# EAGLE board Irnardo_REVAbkp (EAGLE 6.5.0)
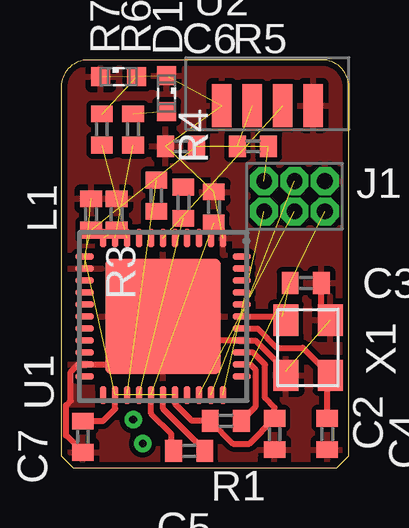
[diagram p0: board, top side]
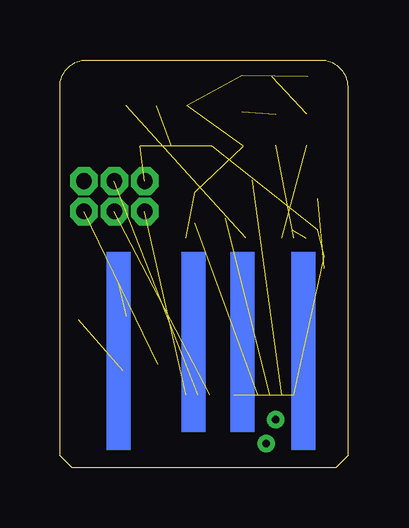
[diagram p1: board, bottom side, seen from below]

Size 12 x 17 mm. Coordinates in mm from the lower left corner, seen from the top.
Outline: 0.5,0 11.5,0 12,0.5 12,15.88 arc90 10.88,17 1.12,17 arc90 0,15.88 0,0.5 0.5,0
Copper layers (1*16): Top 0.035mm / dielectric 1.5mm / Bottom 0.035mm
Design rules "default *": minimum track width 10mil, minimum drill 24mil, track to track 8mil, track to pad 8mil, pad to pad 8mil, via to via 8mil, smd to smd 8mil, copper to edge 10mil, drill to drill 8mil, minimum pad ring 10mil, minimum via ring 8mil, stop-mask expansion 4mil, vias tented up to drill 0mil, thermal gap 10mil

## Footprints (pad centres in the part's own frame; a part is rotated, then mirrored left to right if it is on the bottom)
C0402 = smd 0.7 x 0.9: 1 -0.65,0; 2 0.65,0
SML0603 = smd 0.8 x 0.8: A 0.75,0; C -0.75,0
6X2005IN = drill 0.65 pad 0.813 octagon: 1 -1.27,0; 2 -1.27,1.27; 3 0,0; 4 0,1.27; 5 1.27,0; 6 1.27,1.27
0402 = smd 0.7 x 0.9: 1 -0.65,0; 2 0.65,0
R0402 = smd 0.7 x 0.9: 1 -0.65,0; 2 0.65,0
SMARTPRJ_QFN44ML7X7 = smd 0.75 x 0.275: 1 -3.275,2.5; 2 -3.275,2; 3 -3.275,1.5; 4 -3.275,1; 5 -3.275,0.5; 6 -3.275,0; 7 -3.275,-0.5; 8 -3.275,-1; 9 -3.275,-1.5; 10 -3.275,-2; 11 -3.275,-2.5; 23 3.275,-2.5; 24 3.275,-2; 25 3.275,-1.5; 26 3.275,-1; 27 3.275,-0.5; 28 3.275,0; 29 3.275,0.5; 30 3.275,1; 31 3.275,1.5; 32 3.275,2; 33 3.275,2.5 | smd 0.275 x 0.75: 12 -2.5,-3.275; 13 -2,-3.275; 14 -1.5,-3.275; 15 -1,-3.275; 16 -0.5,-3.275; 17 0,-3.275; 18 0.5,-3.275; 19 1,-3.275; 20 1.5,-3.275; 21 2,-3.275; 22 2.5,-3.275; 34 2.5,3.275; 35 2,3.275; 36 1.5,3.275; 37 1,3.275; 38 0.5,3.275; 39 0,3.275; 40 -0.5,3.275; 41 -1,3.275; 42 -1.5,3.275; 43 -2,3.275; 44 -2.5,3.275 | smd 4.826 x 4.826: EXP 0,0
TSOP755 = smd 0.8 x 1.8: 1 0,0; 2 1.27,0; 3 2.54,0; 4 3.81,0
SMARTPRJ_CRYSTAL-3.2-2.5 = smd 1.3 x 1.05: 1 -1.15,-0.925; 2 1.15,-0.925; 3 1.15,0.925; 4 -1.15,0.925

## Placement (x,y rotation side)
C1  100n  [C0402]  1.25,10.56 90 top
C2  100n  [C0402]  8.9,1.4 270 top
C3  22p  [C0402]  10.2,7.7 0 top
C4  22p  [C0402]  11.1,1.4 270 top
C5  1uF  [C0402]  5.34,0.7 180 top
C6  100n  [C0402]  5,13.4 180 top
C7  100n  [C0402]  0.9,1.29 270 top
D1  RED  [SML0603]  4.4,15.6 270 top
D2  950nm  [SML0603]  2.4,16.3 0 top
J1  ICSP  [6X2005IN]  9.73,10.68 0 top
L1  30Z  [0402]  6.37,10.85 90 top
R1  10K  [R0402]  6.87,1.95 0 top
R3  22R  [R0402]  3.97,11.34 90 top
R4  22R  [R0402]  5.1,11.05 270 top
R5  100R  [R0402]  8,13.4 180 top
R6  [R0402]  3,14.1 90 top
R7  [R0402]  1.7,14.1 90 top
R8  10K  [R0402]  2.31,10.56 90 top
U1  ATMEGA32U4-MU  [SMARTPRJ_QFN44ML7X7]  4.25,6.3 90 top
U2  TSOP755  [TSOP755]  6.7,15.1 0 top
X1  16MHz  [SMARTPRJ_CRYSTAL-3.2-2.5]  10.3,5 270 top

## Library data of the parts
C1-C7 R1 R3-R8 = resistor
D1 D2 = led
J1 = 6X2005IN
L1 = inductors
U1 X1 = Arduino_Leonardo-REV3b
U2 = TSOP755; U: TSOP755

## Nets
+5V: C1.1 C2.1 C6.1 C7.1 J1.2 R1.1 R5.1 U1.2 U1.7 U1.14 U1.34
AREF: U1.42
AVCC: U1.24
AVCC1: U1.44
D+: R4.1
D-: R3.1
GND: C1.2 C2.2 C3.2 C4.2 C6.2 C7.2 D1.C D2.C J1.6 L1.2 R8.2 U1.15 U1.23 U1.35 U1.43 U1.EXP U2.1 U2.4 X1.2 X1.4
IO5: R7.1 U1.31
IO8: U1.28 U2.3
IO13: R6.1 U1.32
MISO: J1.1 U1.11
MOSI: J1.4 U1.10
N$1: C3.1 U1.17 X1.1
N$2: C4.1 U1.16 X1.3
N$5: R5.2 U2.2
N$7: D2.A R7.2
N$8: D1.A R6.2
N$9: R8.1 U1.33
RD+: R4.2 U1.4
RD-: R3.2 U1.3
RESET: J1.5 R1.2 U1.13
SCK: J1.3 U1.9
UCAP: C5.1 U1.6
UGND: C5.2 L1.1 U1.5

## Tracks (layer width: path | path; a pad name or v marks a point on that pad's centre or on a via)
+5V  (6 unrouted)
  Top 0.254: U1.14 8,4.8 8.5,4.3 8.5,2.9 8.9,2.5 C2.1 7.85,1 7.17,1 R1.1 5.45,1.95 4.75,2.65 U1.7 | C7.1 1.74,1.94 2.25,2.45 U1.2
GND  (7 unrouted)
  Top 0.254: C7.2 0.2,1.34 0.2,2.6 0.4,2.8 0.4,4 0.7,4.3 U1.43 2.25,4.3 U1.EXP 5.25,5.3 U1.15 8.1,5.3 9.38,4.03 X1.2 | X1.4 10.85,6.53 C3.2
  pour Top: -0.5,17.5 -0.5,-0.5 12.5,-0.5 12.5,17.5
IO5  (1 unrouted)
IO8  (1 unrouted)
IO13  (1 unrouted)
MISO  (1 unrouted)
MOSI  (1 unrouted)
N$1  (1 unrouted)
  Top 0.254: U1.17 9.22,6.3 X1.1
N$2
  Top 0.254: U1.16 8.2,5.8 9,5 10.07,5 X1.3 11.1,3.73 C4.1
N$3  (via drill 0.32 pad 0.25)
  other vias: 3,2
N$4  (via drill 0.32 pad 0.25)
  other vias: 3.4,1
N$5  (1 unrouted)
N$7  (1 unrouted)
N$8  (1 unrouted)
N$9  (1 unrouted)
RD+  (1 unrouted)
RD-  (1 unrouted)
RESET  (1 unrouted)
  Top 0.254: U1.13 7.9,4.3 8.1,4.1 8.1,2.53 R1.2
SCK  (1 unrouted)
UCAP
  Top 0.254: C5.1 4.25,2.44 U1.6
UGND  (1 unrouted)
  Top 0.254: C5.2 4.6,0.79 4.6,1.4 3.75,2.25 U1.5
(copper drawn outside any net)
  shapes: Bottom area x4